# Altium PCB DS_NEW.PcbDoc
Units mm, origin at the board's own origin, x right, y up, seen from the top; angles counter-clockwise.
Board outline 77 x 51 mm, 2 copper layers (Top Layer, Bottom Layer); 60 components, 50 nets, 247 pads, 49 vias.
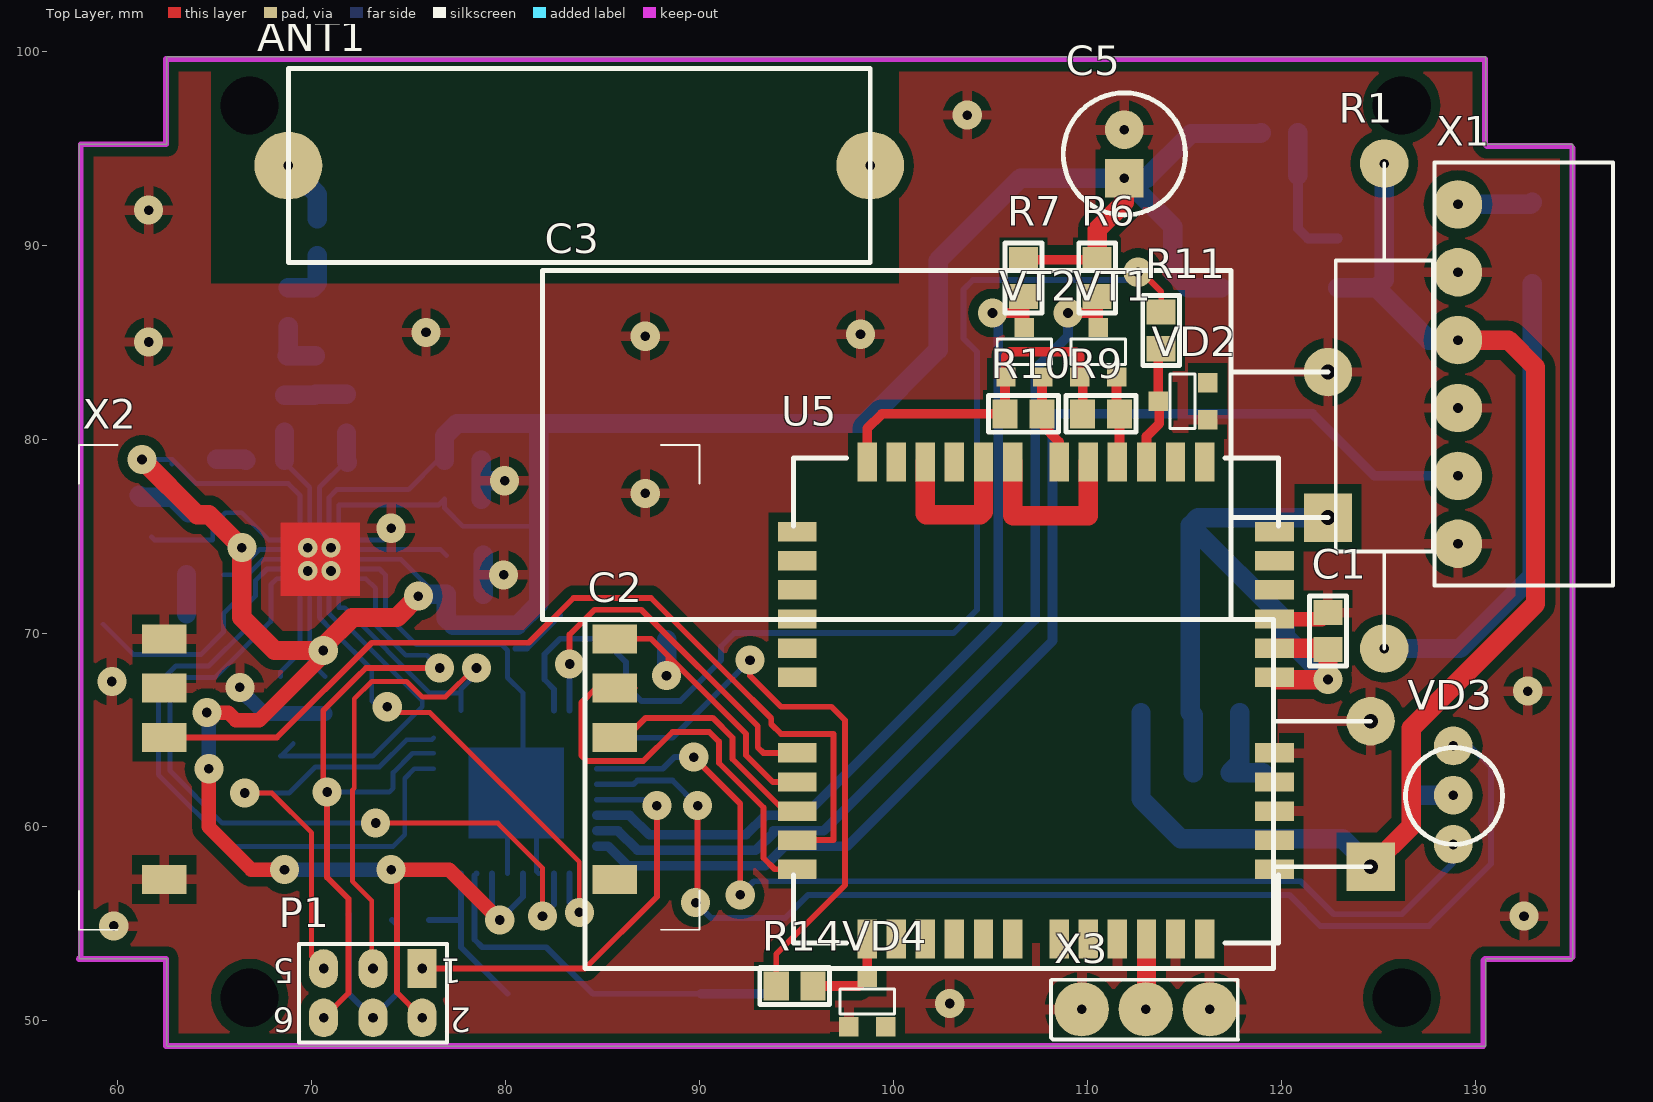
[diagram p0: Top Layer view]
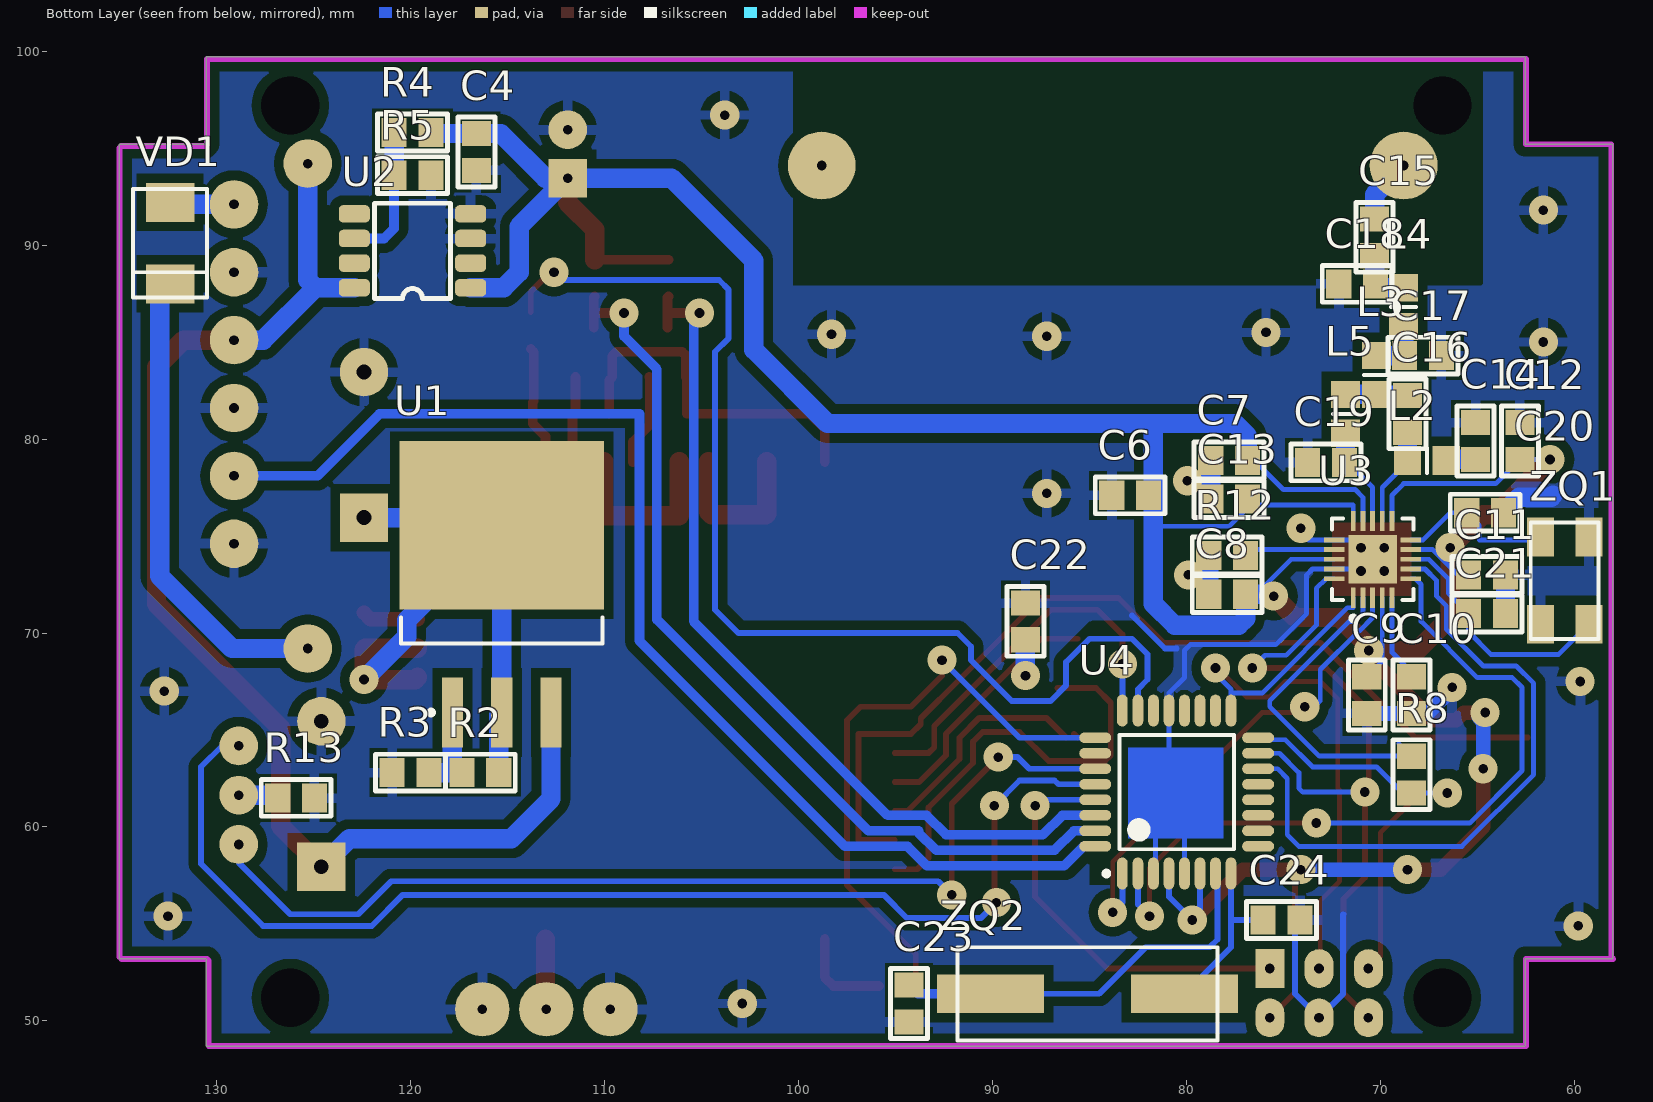
[diagram p1: Bottom Layer view, seen from below]

## Layer stack, top to bottom
Top Layer: signal copper 0.0356
Dielectric: dielectric 0.32, FR-4, Dk 4.8
Bottom Layer: signal copper 0.0356

## Board outline
58.02,53.203 62.52,53.203 62.52,48.703 130.52,48.703 130.52,53.203 135.02,53.203 135.02,95.203 130.52,95.203 130.52,99.703 62.52,99.703 62.52,95.203 58.02,95.203

## Design rules (kind name [scope] priority, off if disabled: settings)
Clearance Clearance_1 [OnLayer(Keepout) And IsTrack] p1: gap=0.05
Clearance "Clearance_ U4_pins" [InComponent('U4') And IsPad] p2: gap=0.25
Clearance "Clearance_GND_VCC +3.3" [InNet('GND') vs InNet('VCC +3.3')] p3 off: gap=0.2
Clearance Clearance_U3_Trace [(IsTrack  And IsNet)  And InRegion(3815,3770 ,4275 ,4280) vs (IsTrack  And IsNet)  And InRegion(3815,3770 ,4275 ,4280)] p4: gap=0.2
Clearance Clearance_QFP_NET [InNet('GND','NetC16_1','NetC19_1','NetC6_2','NetC20_1','NetC21_1','SPI_SS','SPI_SCK','SPI_MOSI','SPI_MISO','NetR12_2','NetC10_2','TR_GDO2','TR_GDO0','NetR8_1','VCC+3.3V')  And InRegion(2560,2673 ,2960 ,3110) vs InNet('GND','NetC16_1','NetC19_1','NetC6_2','NetC20_1','NetC21_1','SPI_SS','SPI_SCK','SPI_MOSI','SPI_MISO','NetR12_2','NetC10_2','TR_GDO2','TR_GDO0','NetR8_1')  And InRegion(2560,2673 ,2960 ,3110)] p5: gap=0.2
Clearance Clearance_QFP_Pins [InComponent('U3') And IsPad] p6: gap=0.2
Clearance Clearance_GND [InPolygon] p7: gap=0.5
Clearance [All] p8: gap=0.3
ComponentClearance ComponentClearance_R1_C10 [InComponent('C10') vs InComponent('R1')] p1 off: gap=0 collisioncheckmode=3 verticalgap=0 showdistances=FALSE
ComponentClearance [All] p2 off: gap=0.3 collisioncheckmode=3 verticalgap=0.3 showdistances=FALSE
HoleSize [All] p1: absolutevalues=TRUE maxlimit=5 minlimit=0.3 maxpercent=80.000 minpercent=20.000
MinimumSolderMaskSliver [All] p1 off: minsoldermaskwidth=0.254
NetAntennae [All] p1 off: netantennaetolerance=50
PlaneConnect [All] p1: planeconnectstyle=Relief reliefexpansion=0.508 reliefentries=4 reliefconductorwidth=0.3 reliefairgap=0.3
PolygonConnect [All] p1: connectstyle=Relief reliefconductorwidth=0.5 reliefentries=4 polygonreliefangle="90 Angle"
RoutingCorners [All] p1: cornerstyle=45-Degree minsetback=2.54 maxsetback=5
RoutingVias [All] p1: holewidth=0.5 width=1.6 viastyle="Through Hole" minholewidth=0.3 minwidth=1 maxholewidth=1 maxwidth=2
ShortCircuit ShortCircuit_ANT1 [InComponent('ANT1')] p1 off: allowed=TRUE
ShortCircuit [All] p2: allowed=FALSE
SilkToSilkClearance [All] p1 off: silktosilkclearance=0.3
SilkscreenOverComponentPads [All] p1 off: minsilkscreentomaskgap=0.254
SolderMaskExpansion [All] p1: expansion=0.102
Width [All] p1: maxlimit=5 minlimit=0.2 preferedwidth=0.3
19 further rules are at their usual default settings.

## Components (designator, comment, footprint, x,y, rotation, side; value= is the part's Value field where it differs from the comment)
ANT1 "SPIRAL_433MHz" ANT_433MHz_SPIRAL 83.8,94.1 r0 top
C1 "KONDENS_SMD" C0805 122.4,70.1 r90 top
C2 "K50-35" CAP_POL_D18-Horizontal 124.6,61.7 r180 top
C3 "K50-35" CAP_POL_D18-Horizontal 122.4,79.7 r180 top
C4 "KONDENS_SMD" C0805 116.6,94.8 r270 bottom
C5 "K50-35" CAP_POL_D6.3 111.9,94.7 r90 top
C6 "KONDENS_SMD" C0805 82.9,77.1 r180 bottom
C7 "KONDENS_SMD" C0805 77.8,78.9 r180 bottom
C8 "KONDENS_SMD" C0805 77.9,72 r180 bottom
C9 "KONDENS_SMD" C0805 70.7,66.8 r90 bottom
C10 "KONDENS_SMD" C0805 68.4,66.8 r90 bottom
C11 "KONDENS_SMD" C0805 64.5,73 r0 bottom
C12 "KONDENS_SMD" C0805 62.8,79.9 r270 bottom
C13 "KONDENS_SMD" C0805 77.8,76.9 r180 bottom
C14 "KONDENS_SMD" C0805 65.1,79.9 r90 bottom
C15 "KONDENS_SMD" C0805 70.3,90.4 r270 bottom
C16 "KONDENS_SMD" C0805 68.6,81.3 r90 bottom
C17 "KONDENS_SMD" C0805 67.8,84.3 r180 bottom
C18 "KONDENS_SMD" C0805 71.2,88 r0 bottom
C19 "KONDENS_SMD" C0805 72.8,78.8 r0 bottom
C20 "KONDENS_SMD" C0805 64.6,76.2 r180 bottom
C21 "KONDENS_SMD" C0805 64.5,71 r180 bottom
C22 "KONDENS_SMD" C0805 88.3,70.6 r270 bottom
C23 "KONDENS_SMD" C0805 94.3,50.9 r270 bottom
C24 "KONDENS_SMD" C0805 75.1,55.2 r180 bottom
L2 "SMD_0805" 6-0805_M 67.6,78.9 r180 bottom
L3 "SMD_0805" 6-0805_M 70.2,83.3 r90 bottom
L4 "SMD_0805" 6-0805_M 68.8,86.8 r90 bottom
L5 "SMD_0805" 6-0805_M 71.8,81.3 r90 bottom
P1 "Header 3X2" HDR2X3 75.7,52.7 r180 top
R1 "KNP-200" "Resistor KNP-200" 125.3,69.2 r90 top
R2 "RES" C0805 116.4,62.8 r180 bottom
R3 "RES" C0805 120,62.8 r180 bottom
R4 "RES" C0805 119.9,95.8 r180 bottom
R5 "RES" C0805 119.9,93.6 r0 bottom
R6 "RES" C0805 110.5,88.3 r90 top
R7 "RES" C0805 106.7,88.3 r90 top
R8 "RES" C0805 68.4,62.7 r270 bottom
R9 "RES" C0805 110.7,81.3 r180 top
R10 "RES" C0805 106.7,81.3 r180 top
R11 "RES" C0805 113.8,85.6 r90 top
R12 "RES" C0805 77.9,74 r180 bottom
R13 "RES" C0805 125.9,61.5 r0 bottom
R14 "RES" C0805 94.9,51.8 r180 top
U1 "LM1086CS-ADJ" TS3B_M 115.3,72 r90 bottom
U2 "LP2951" SOIC-8 116.9,87.8 r0 bottom
U3 "CC1101" VQFN20 70.4,73.8 r90 bottom
U4 "ATmega8A-AU" 32A_N 80.5,61.8 r90 bottom
U5 "WISMO 228" WISMO 95,75.2 r0 top
VD1 "10BQ100" SMB 132.4,90.1 r90 bottom
VD2 "BZX84C2V7" SOT23 116.2,81 r90 top
VD3 "LIGHTDIODE2" LIGHTDIODE2 128.9,61.6 r270 top
VD4 "BZX84C2V7" SOT23 97.7,49.7 r0 top
VT1 "BSS138-SOT23" SOT23 109.6,83.2 r0 top
VT2 "BSS138-SOT23" SOT23 105.8,83.2 r0 top
X1 "15EDGRC-3.5-06P" 15EDGRC-3.5-06P 129.1,92.1 r270 top locked
X2 "MOLEX91228-0001" MOLEX91228-0001 86,69.7 r180 top
X3 "ANT-Healder" ANT-Healder 113,50.6 r180 top
ZQ1 "SMD0603" Quartz_SMD0603 60.5,72.7 r90 bottom
ZQ2 "HC-49SMD" HC-49SMD 85.1,51.4 r180 bottom

## Footprints (in the part's own frame and the unit in brackets; to place one, negate y for a bottom-side part, rotate by r counter-clockwise, add the part's x,y. Pads: shape width x height; smd on the part's side, far side on the other; paste and mask are expansions set on the pad)
6-0805_M [mm] "Chip Resistor, Body 2.0x1.2mm, IPC Low Density"
  rect 1.4x1.5 smd: 1(-1,0) 2(1,0)
  silkscreen extent 0,-0.65 0,0.65, body extent -1.07,-0.7 1.07,0.7, height 0.7
15EDGRC-3.5-06P [mm]
  round 2.5 hole 0.5: 1(0,0) 2(3.5,0) 3(7,0) 4(10.5,0) 5(14,0) 6(17.5,0)
  silkscreen extent -2.15,-1.2 19.65,8, body extent -2.1,-1.2 19.6,8, height 7
32A_N [mm] "Thin QFP, 32-Leads, Body 7x7mm, Pitch 0.8mm, IPC Medium Density"
  oval 1.65x0.55 smd: 1(-4.2,2.8) 2(-4.2,2) 3(-4.2,1.2) 4(-4.2,0.4) 5(-4.2,-0.4) 6(-4.2,-1.2) 7(-4.2,-2) 8(-4.2,-2.8) 17(4.2,-2.8) 18(4.2,-2) 19(4.2,-1.2) 20(4.2,-0.4) 21(4.2,0.4) 22(4.2,1.2) 23(4.2,2) 24(4.2,2.8)
  oval 0.55x1.65 smd: 9(-2.8,-4.2) 10(-2,-4.2) 11(-1.2,-4.2) 12(-0.4,-4.2) 13(0.4,-4.2) 14(1.2,-4.2) 15(2,-4.2) 16(2.8,-4.2) 25(2.8,4.2) 26(2,4.2) 27(1.2,4.2) 28(0.4,4.2) 29(-0.4,4.2) 30(-1.2,4.2) 31(-2,4.2) 32(-2.8,4.2)
  silkscreen extent -4.32,-2.95 2.95,3.75, body extent -3.5,-3.5 3.5,3.5, height 1.2
ANT-Healder [mm]
  round 2.8 hole 0.5: 1(0,0) 2(-3.3,0) 3(3.3,0)
  silkscreen extent -4.78,-1.53 4.87,1.55
ANT_433MHz_SPIRAL [mm]
  round 3.5 hole 0.5: 1(-15,0) 2(15,0)
  silkscreen extent -15,-5 15,5
C0805 [mm]
  rect 1.3x1.5 smd: 1(-0.95,0) 2(0.95,0)
  silkscreen extent -1.8,-0.95 1.8,0.95
CAP_POL_D6.3 [mm]
  rect 2x2 hole 0.5: 1(-1.25,0)
  round 2 hole 0.5: 2(1.25,0)
  silkscreen extent -3.15,-3.15 3.15,3.15, body extent -3.13,-3.14 3.15,3.14, height 11
CAP_POL_D18-Horizontal [mm]
  rect 2.5x2.5 hole 0.762: 1(0,3.75)
  round 2.5 hole 0.762: 2(0,-3.75)
  silkscreen extent 0,-9 40.5,9
HC-49SMD [mm]
  rect 5.5x2 smd: 1(-5,0) 2(5,0)
  silkscreen extent -6.7,-2.4 6.7,2.4, body extent -6.7,-2.4 6.7,2.4, height 4
HDR2X3 [mm] "Connector; Header; 3x2 Position"
  rect 1.5x2 hole 0.5: 1(0,0)
  oval 1.5x2 hole 0.5: 2(0,2.54) 3(2.54,0) 4(2.54,2.54) 5(5.08,0) 6(5.08,2.54)
  silkscreen extent -1.27,-1.27 6.35,3.81
LIGHTDIODE2 [mm]
  round 2 hole 0.5: 1(-0.04,-0.04) 2(-2.58,-0.04) 3(2.5,-0.04)
  silkscreen extent -2.5,-2.5 2.5,2.5
MOLEX91228-0001 [mm]
  rect 2.3x1.5 smd: 1(0.38,0) 2(0.38,2.54) 3(0.38,5.08) 4(23.6,0) 5(23.6,2.54) 6(23.6,5.08) 7(23.6,12.4) 8(0.38,12.4)
  silkscreen extent -4,-10 28,15
Quartz_SMD0603 [mm]
  rect 2x1.4 smd: 1(-2.25,-1.25) 2(2.25,-1.25) 3(2.25,1.25) 4(-2.25,1.25)
  silkscreen extent -3,-1.75 3,1.75
"Resistor KNP-200" [mm]
  round 2.5 hole 0.5: 1(0,0) 2(25,0)
  silkscreen extent 0,-2.5 25,2.5
SMB [mm]
  rect 2x2.5 smd: 1(-2.1,0) 2(2.1,0)
  silkscreen extent -2.8,-1.9 2.8,1.9
SOIC-8 [mm]
  rrect50% 1.6x0.9 smd: 1(0,0) 2(0,-1.27) 3(0,-2.54) 4(0,-3.81) 5(6,-3.81) 6(6,-2.54) 7(6,-1.27) 8(6,0)
  silkscreen extent 1.05,-4.36 4.95,0.55
SOT23 [mm]
  rect 1x1 smd: 1(0,0) 2(1.9,0) 3(0.95,2.55)
  silkscreen extent -0.45,0.65 2.35,1.95
TS3B_M [mm] "D2-PAK, 4-Leads, Body 8.6x10.2mm, Pitch 2.54mm, Lead Span 14.2mm, IPC Low Density"
  rect 3.6x1.1 smd: 1(-6.1,2.54) 2(-6.1,0) 3(-6.1,-2.54)
  rect 8.7x10.55 smd: 4(3.55,0)
  silkscreen extent -6.22,-5.2 -1.2,5.2, body extent -2.55,-5.2 6.34,5.2, height 4.64
VQFN20 [mm] "QFN, 20-Leads, Body 4,2x4,2mm (max), Pitch 0,50mm, IPC Low Density"
  rect 1.05x0.25 smd: 1(-1.975,1) 2(-1.975,0.5) 3(-1.975,0) 4(-1.975,-0.5) 5(-1.975,-1) 11(1.975,-1) 12(1.975,-0.5) 13(1.975,0) 14(1.975,0.5) 15(1.975,1)
  rect 0.25x1.05 smd: 6(-1,-1.975) 7(-0.5,-1.975) 8(0,-1.975) 9(0.5,-1.975) 10(1,-1.975) 16(1,1.975) 17(0.5,1.975) 18(0,1.975) 19(-0.5,1.975) 20(-1,1.975)
  rect 2.5x2.5 smd: 21(0,0)
  silkscreen extent -3.17,-2.1 2.1,2.1, body extent -2.07,-2.07 2.07,2.07, height 0.8
WISMO [mm]
  rect 2x1 smd: 1(0.04,0.02) 2(0.04,-1.48) 3(0.04,-2.98) 4(0.04,-4.48) 5(0.04,-5.98) 6(0.04,-7.48) 7(0.04,-11.38) 8(0.04,-12.88) 9(0.04,-14.38) 10(0.04,-15.88) 11(0.04,-17.38) 24(24.64,-17.38) 25(24.64,-15.88) 26(24.64,-14.38) 27(24.64,-12.88) 28(24.64,-11.38) 29(24.64,-7.48) 30(24.64,-5.98) 31(24.64,-4.48) 32(24.64,-2.98) 33(24.64,-1.48) 34(24.64,0.02)
  rect 1x2 smd: 12(3.64,-20.98) 13(5.14,-20.98) 14(6.64,-20.98) 15(8.14,-20.98) 16(9.64,-20.98) 17(11.14,-20.98) 18(13.54,-20.98) 19(15.04,-20.98) 20(16.54,-20.98) 21(18.04,-20.98) 22(19.54,-20.98) 23(21.04,-20.98) 35(21.04,3.62) 36(19.54,3.62) 37(18.04,3.62) 38(16.54,3.62) 39(15.04,3.62) 40(13.54,3.62) 41(11.14,3.62) 42(9.64,3.62) 43(8.14,3.62) 44(6.64,3.62) 45(5.14,3.62) 46(3.64,3.62)
  silkscreen extent -0.16,-21.18 24.84,3.82, body extent -0.1,-21.2 24.8,3.8, height 2.8

## Part data
ANT1: library part ANT_433MHz_SPIRAL
C2 C3: library part "Capasitor _pol D18"
C5: library part "Capasitor_pol D6.3"
L2 L3 L4 L5: library part Induktor_0805
P1: "Header, 3-Pin, Dual row"
R1: library part "Resistor 2W"
R2 R3 R4 R5 R6 R7 R8 R9 R10 R11 R12 R13 R14: "Resistor"
U1: "1.5A Low Dropout Positive Regulators, 3-pin TO-263"
U4: "8-bit AVR Microcontroller, 8KB Flash, 512 Bytes EEPROM, 1KB SRAM, 32-pin TQFP, Industrial Grade (-40°C to 85°C)"
X3: library part ANT_HELDER
ZQ1: library part Quartz_SMD0603

## Free pads (board coordinates)
  round 0 hole 3 unplated: 0(66.8,97.2) 1(126.2,97.2) 2(126.2,51.2) 3(66.8,51.2)

## Via types
v1: diameter 1.5, hole 0.5, Top Layer to Bottom Layer, 45 vias
v2: diameter 1, hole 0.5, Top Layer to Bottom Layer, tented top, 4 vias

## Nets (pads, with @x,y where several pads share a name; then routed paths per layer and width w, separated by ;. In a path a pad name is that pad's centre, name@x,y a point inside that pad or via, vN(x,y) a via of type N, cw(c..) or ccw(c..) an arc to the next point about the centre after c; other vN are vias at no path point)
GND: C1.2 C2.2 C3.2 C4.2 C5.2 C6.1 C7.1 C8.1 C9.1 C10.1 C11.1 C12.1 C13.1 C14.2 C17.2 C18.2 C19.2 C20.2 C21.2 C22.1 C23.2 C24.2 P1.4 R3.1 R5.1 R12.1 R13.1 U2.3 U2.4 U3.16 U3.19 U3.21 U4.3 U4.5 U4.21 U5.20 U5.22 U5.26 U5.28 U5.31 VD2.1 VD4.1 X1.2 X1.4 X1.6 X2.4 X2.5 X2.7 X3.2 X3.3 ZQ1.2 ZQ1.4 | length 66.5
  Top Layer w0.25: v1(74.1,75.4) v1@74.2,75.5
  Top Layer w0.75: U5.31 122.07,70.72 C1.2
  Bottom Layer w0.25: v2(71,73.2) 71.1,73.3 U3.19 73.5,73.3 73.8,73 73.8,71 75.4,69.4 79.8,69.4 80.1,69.1 80.1,67.7 80.9,66.9 U4.21 80.9,61.2 80.8,61.1 ; v2(71,74.4) 71.4,74.8 U3.16 73.7,74.8 74,75.1 74,75.3 v1(74.1,75.4) ; U4.5 80.1,61.1 80.8,61.1 ; U4.3 81.6,57.7 81.6,61.1 80.8,61.1
  Bottom Layer w0.3: 71.9,55.5 71.92,55.48 71.92,51.4 P1.4 74.4,51.4 74.4,54.95 C24.2 ; 80.5,69.2 81.1,69.2 82.8,70.9
  Bottom Layer w0.75: v1(66.3,67.2) 66.2,67.2 67.55,65.85 C10.1 C9.1
  Bottom Layer w1: 61.1,77.1 61.2,77 62.85,77 C20.2 ; C21.2 C11.1 ; C13.1 78.75,77.85 ; C7.1 78.75,77.85 ; C8.1 78.85,73 ; R12.1 78.85,73 ; v1(79.9,73) 78.85,73 ; v1(79.95,77.85) 78.75,77.85
  other v1: 102.9,50.9 59.8,54.9 132.5,55.4 132.7,67 59.7,67.5 87.2,77.2 61.6,85 87.2,85.3 98.3,85.4 75.9,85.5 61.6,91.8 103.8,96.7
  other v2: 69.8,73.2 69.8,74.4
NetANT1_1: ANT1.1 C15.1 | length 3.4
  Bottom Layer w1: ANT1.1 70.3,92.6 C15.1
NetC2_1: C2.1 R1.2 U1.3 U2.8 X1.3 | length 65.5
  Top Layer w1: C2.1 126.7,60.05 126.7,65.1 133.1,71.5 133.1,83.7 131.7,85.1 X1.3
  Bottom Layer w1: U1.3 112.76,61.44 114.8,59.4 123.15,59.4 C2.1 ; U2.8 124.9,87.8 ; R1.2 125.3,88.2 124.9,87.8 ; X1.3 127.6,85.1 124.9,87.8
NetC10_2: C10.2 U3.5 | length 4.5
  Bottom Layer w0.25: C10.2 68.4,68 69.4,69 U3.5
NetC14_1: C14.1 L2.2 | length 1.5
  Bottom Layer w1: C14.1 66.55,78.95 L2.2
NetC15_2: C15.2 C18.1 L4.2 | length 3
  Bottom Layer w1: L4.2 70.05,87.8 C18.1 70.3,88.05 C15.2
NetC16_1: C16.1 L2.1 U3.12 | length 5.1
  Bottom Layer w0.25: L2.1 68.6,78.8 69.9,77.5 U3.12
  Bottom Layer w1: L2.1 C16.1
NetC16_2: C16.2 L3.1 L5.2 | length 3.2
  Bottom Layer w1: C16.2 70.15,82.25 L3.1 L5.2
NetC17_1: C17.1 L3.2 L4.1 | length 3
  Bottom Layer w1: L4.1 68.8,84.35 C17.1 L3.2
NetC19_1: C19.1 L5.1 U3.13 | length 5.2
  Bottom Layer w0.25: U3.13 70.4,77.5 71.75,78.85 C19.1@71.8,78.85
  Bottom Layer w1: L5.1 71.8,78.85 C19.1
NetC20_1: C20.1 U3.10 ZQ1.3 | length 8.3
  Bottom Layer w0.25: ZQ1.3 61.9,74.8 64.9,74.8 64.9,75.55 C20.1 66.4,76.2 67.8,74.8 U3.10
NetC21_1: C21.1 U3.8 ZQ1.1 | length 12.8
  Bottom Layer w0.25: ZQ1.1 60.8,68.9 64.3,68.9 65.45,70.05 C21.1 66.5,72.05 66.5,72.8 67.5,73.8 U3.8
NetC22_2: C22.2 U5.8 X2.1 | length 16
  Top Layer w0.3: X2.1 87.5,69.7 88.4,68.8 ; v1(88.3,67.8) 88.4,67.9 88.4,68.8 ; U5.8 93.78,62.32 92.4,63.7 92.4,64.8 88.4,68.8
  Bottom Layer w1: v1(88.3,67.8) C22.2
NetC23_1: C23.1 U4.7 ZQ2.1 | length 20.7
  Bottom Layer w0.3: U4.7 78.4,57.5 78.4,54.2 78.8,53.8 82.1,53.8 84.5,51.4 ZQ2.1
  Bottom Layer w0.5: ZQ2.1 93.85,51.4 C23.1
NetC24_1: C24.1 U4.8 ZQ2.2 | length 8.8
  Bottom Layer w0.3: C24.1 77.7,55.2 ; U4.8 77.7,55.2 ; ZQ2.2 77.7,53.8 77.7,55.2
NetR1_1: R1.1 VD1.1 | length 24.2
  Bottom Layer w1: R1.1 129.2,69.2 132.938,72.938 VD1.1@132.938,88
NetR3_2: R2.1 R3.2 U1.1 | length 5
  Bottom Layer w1: U1.1 117.84,63.29 R2.1 R3.2
NetR4_1: R4.1 R5.2 U2.6 | length 7.2
  Bottom Layer w0.5: R5.2 120.85,90.85 121.36,90.34 U2.6
  Bottom Layer w1: R5.2 R4.1
NetR8_1: R8.1 U3.2 | length 17.1
  Bottom Layer w0.25: 69.05,64.3 R8.1 73.15,63.65 75.7,66.2 75.7,66.5 71.6,70.6 71.3,70.6 70.9,71 U3.2
NetR9_1: R9.1 U5.38 VT1.2 | length 4.5
  Top Layer w0.5: VT1.2 111.5,81.45 R9.1 111.65,78.93 U5.38
NetR9_2: R9.2 R10.2 U5.46 VT1.1 VT2.1 | length 19.2
  Top Layer w0.5: U5.46 98.64,80.54 99.4,81.3 R10.2 105.75,83.15 VT2.1 105.8,84.3 106,84.5 109.4,84.5 109.6,84.3 VT1.1 109.75,83.05 R9.2
NetR10_1: R10.1 U5.40 VT2.2 | length 4.8
  Top Layer w0.5: VT2.2 107.65,83.15 R10.1 107.65,80.75 108.54,79.86 U5.40
NetR11_1: R11.1 U5.37 VD2.3 | length 6.2
  Top Layer w0.5: U5.37 113.04,80.14 113.7,80.8 113.7,81.9 VD2.3 113.65,84.5 R11.1
NetR12_2: R12.2 U3.17 | length 4.7
  Bottom Layer w0.25: U3.17 76.65,74.3 R12.2
NetR13_2: R13.2 VD3.1 | length 2.1
  Bottom Layer w1: R13.2 126.99,61.64 VD3.1
NetR14_1: R14.1 U5.12 VD4.3 | length 5
  Top Layer w0.5: R14.1 98.2,51.8 VD4.3 98.64,52.26 U5.12
NetU4_27: U4.27 VD3.3 | length 53.6
  Top Layer w0.3: v1(89.7,63.6) 92.1,61.2 v1(92.1,56.5)
  Bottom Layer w0.3: U4.27 88.1,63 88.7,63.6 v1(89.7,63.6) v1@90.2,63.6 ; v1(92.1,56.5) 92.8,57.2 121,57.2 122.7,55.5 126.2,55.5 128.86,58.16 VD3.3
NetU4_28: U4.28 VD3.2 | length 62.1
  Top Layer w0.3: v1(89.8,56.1) 89.9,56.1 v1(89.9,61.1)
  Bottom Layer w0.3: U4.28 86.6,62.2 86.8,62.4 88.6,62.4 v1(89.9,61.1) ; v1(89.8,56.1) 90.6,55.3 94.4,55.3 95.6,56.5 120.4,56.5 122,54.9 127.6,54.9 130.8,58.1 130.8,63.1 129.72,64.18 VD3.2
NetU4_32: U4.32 X1.5 | length 62.6
  Bottom Layer w0.5: U4.32 85.3,59 86.3,58 93.375,58 94.375,59 97.6,59 108.2,69.6 108.2,81.3 121.6,81.3 124.8,78.1 X1.5
NetU5_9: U5.9 X2.3 | length 12.1
  Top Layer w0.3: X2.3 X2.3@85.8,64.8 ; X2.3@86.22,64.62 87.225,65.625 90.675,65.625 91.7,64.6 91.7,63.5 94.38,60.82 U5.9
NetU5_10: U5.10 X2.6 | length 47.9
  Top Layer w0.3: X2.6 68.22,64.62 73.1,69.5 81.2,69.5 83.5,71.8 87.5,71.8 91.7,67.6 93.7,65.6 93.7,65.3 94.2,64.8 96.9,64.8 96.9,59.32 U5.10
NetU5_11: U5.11 X2.2 | length 22.7
  Top Layer w0.3: X2.2@86.64,67.16 X2.2 84.66,67.16 83.9,66.4 83.9,63.7 84.2,63.4 87.1,63.4 88.6,64.9 90.5,64.9 91,64.4 91,63.3 93.3,61 93.3,58.4 93.88,57.82 U5.11
NetU5_21: U5.21 X3.1 | length 3.6
  Top Layer w1: X3.1 113.04,50.64 U5.21
NetU5_39: U5.39 U5.41 | length 9.4
  Top Layer w1: U5.41 106.14,76.06 106.16,76.04 110.04,76.04 U5.39
NetU5_42: U5.42 U5.44 | length 8.3
  Top Layer w1: U5.44 101.64,76.14 101.68,76.1 104.48,76.1 104.64,76.26 U5.42
NetVD1_2: VD1.2 X1.1 | length 3.9
  Bottom Layer w1: X1.1 132.838,92.1 VD1.2@132.938,92.2
ON/OFF: R11.2 U4.23 | length 59
  Top Layer w0.3: v1(112.6,88.6) 112.8,88.6 113.8,87.6 R11.2
  Bottom Layer w0.3: U4.23 82.5,67.1 82,67.6 82,68.9 82.8,69.7 85,69.7 86.2,68.5 86.2,67.3 87,66.5 89,66.5 91.1,68.6 91.1,69.3 91.8,70 103.1,70 104.3,71.2 104.3,84.5 103.6,85.2 103.6,87.7 104.1,88.2 112.2,88.2 v1(112.6,88.6)
READY: U4.24 U5.7 | length 19.9
  Top Layer w0.3: v1(83.3,68.4) 83.3,69.916 84.584,71.2 87,71.2 93,65.2 93,64.1 93.28,63.82 U5.7
  Bottom Layer w0.3: U4.24 v1(83.3,68.4)
RESET: R14.2 U4.25 | length 31.4
  Top Layer w0.3: v1(92.6,68.6) 92.6,67.8 94.2,66.2 96.8,66.2 97.5,65.5 97.5,57 93.95,53.45 R14.2
  Bottom Layer w0.3: U4.25 88.6,64.6 v1(92.6,68.6)
RESET_MCU: P1.1 U4.29 | length 21.6
  Top Layer w0.3: P1.1 84.1,52.7 87.8,56.4 v1(87.8,61.1)
  Bottom Layer w0.3: U4.29 87.5,61.4 v1(87.8,61.1)
RXD: R7.1 U4.30 VT2.3 | length 45.2
  Top Layer w0.5: v1(105.1,86.5) 106.75,86.5 ; R7.1 106.75,87.3 106.75,86.5 ; VT2.3 106.75,86.5
  Bottom Layer w0.5: U4.30 86.4,60.6 87.4,59.6 92.4,59.6 93.4,60.6 95.4,60.6 105.4,70.6 105.4,86.2 v1(105.1,86.5) v1@104.9,86.7
SPI_MISO: P1.5 R8.2 U4.16 | length 22.5
  Top Layer w0.25: v1(66.55,61.75) 67.95,61.75 70,59.7 70,53.32 P1.5
  Bottom Layer w0.25: v1(66.55,61.75) R8.2 68.85,61.75 70.2,63.1 73.5,63.1 74.9,64.5 76.2,64.5 U4.16
SPI_MOSI: P1.6 U3.20 U4.15 | length 38.5
  Top Layer w0.3: P1.6 71.9,51.44 71.9,56.3 70.8,57.4 v1(70.8,61.8) 70.6,62 70.6,66 72.3,67.7 72.8,68.2 v1(76.6,68.2)
  Bottom Layer w0.25: v1@70.8,62.4 v1(70.8,61.8) 74,61.8 74.2,62 74.2,62.8 75.2,63.8 U4.15 ; U3.20 72.8,72.8 73.3,72.3 73.3,70.4 74.85,68.85 75.95,68.85 v1(76.6,68.2)
SPI_SCK: P1.3 U3.1 U4.17 | length 33.2
  Top Layer w0.25: P1.3 73.1,52.76 73.1,56.2 72.1,57.2 72.1,61.9 72.2,62 72.2,66.6 73.1,67.5 74.9,67.5 75.7,66.7 76.9,66.7 78.4,68.2 v1(78.5,68.2)
  Bottom Layer w0.25: U3.1 71.4,71.3 71.7,71.3 76.1,66.9 77.7,66.9 ; U4.17 77.7,66.9 ; v1(78.5,68.2) 78.5,67.9 77.7,67.1 77.7,66.9
SPI_SS: U3.7 U4.14 | length 33.7
  Bottom Layer w0.25: U3.7 67.7,73.3 67.1,72.7 67.1,71.9 66.6,71.4 66.6,70.2 64.7,68.3 63,68.3 62.1,67.4 62.1,62.7 65.8,59 74.2,59 74.8,59.6 74.8,62.5 75.3,63 U4.14
TR_GDO0: U3.6 U4.2 | length 39.7
  Top Layer w0.25: v1(73.3,60.2) 79.6,60.2 81.9,57.9 v1(81.9,55.4)
  Bottom Layer w0.25: U3.6 68.2,72.8 67.9,72.5 67.9,70.6 65,67.7 63.2,67.7 62.7,67.2 62.7,62.9 65.4,60.2 v1(73.3,60.2)
  Bottom Layer w0.3: v1(81.9,55.4) 82.5,56 U4.2
TR_GDO2: U3.3 U4.1 | length 25.5
  Top Layer w0.25: v1@73.7,65.9 76.1,65.9 83.8,58.2 v1(83.8,55.6)
  Top Layer w0.3: v1@83.8,55.5 v1(83.8,55.6)
  Bottom Layer w0.25: U3.3 70.4,70.8 71.1,70.1 71.12,70.1 73.1,68.12 73.1,66.5 v1@73.7,65.9
  Bottom Layer w0.3: U4.1 83.3,56.1 v1(83.8,55.6)
  other v1: 73.9,66.2
TXD: R6.1 U4.31 VT1.3 | length 47.8
  Top Layer w0.5: v1(109,86.5) 110.55,86.5 ; R6.1 110.55,87.3 110.55,86.5 ; VT1.3 110.55,86.5
  Bottom Layer w0.5: U4.31 85.8,59.8 86.8,58.8 92.9,58.8 93.8,59.7 93.8,59.8 96.4,59.8 107.3,70.7 107.3,83.6 109,85.3 v1(109,86.5) v1@108.9,86.6
VCC+3.3V: C4.1 C5.1 C6.2 C7.2 C8.2 C9.2 C11.2 C12.2 C13.2 P1.2 R4.2 R6.2 R7.2 U2.1 U3.4 U3.9 U3.11 U3.14 U3.15 U3.18 U4.4 U4.6 | length 198.9
  Top Layer w0.3: v1(74.1,57.8) 74.4,57.5 74.4,51.46 P1.2
  Top Layer w0.5: R7.2 R6.2
  Top Layer w0.75: v1(64.6,65.9) 65.7,65.9 66.1,65.5 67.3,65.5 70.6,68.8 v1(70.6,69.1) ; v1(64.7,63) 64.7,60 66.9,57.8 v1(68.6,57.8) ; v1(74.1,57.8) 77.1,57.8 v1(79.7,55.2)
  Top Layer w1: v1(61.25,78.95) 64.1,76.1 64.7,76.1 v1(66.4,74.4) 66.4,70.8 68.1,69.1 v1(70.6,69.1) 70.6,69.3 72.1,70.8 74.4,70.8 v1(75.5,71.9) ; R6.2 110.5,90.8 111.9,92.2 C5.1
  Bottom Layer w0.25: v1(61.25,78.95) C12.2 ; C12.2@62.8,78.7 C12.2 ; C11.2 66,73 66.65,73.65 ; v1(66.4,74.4) 66.65,74.65 66.65,73.65 ; U3.9 67.3,74.3 66.65,73.65 ; U3.11 69.4,77.1 68.8,77.7 64.05,77.7 C12.2 ; U3.4 v1@69.9,69 ; v1(70.6,69.1) 70.5,69.1 70.6,69 v1@69.9,69 ; C9.2 69.9,68.55 v1@69.9,69 ; U3.14 70.9,77 71.3,77.4 75,77.4 76.5,78.9 C7.2 ; U3.15 71.4,76.6 76.55,76.6 C13.2 76.85,76.45 77.8,75.5 81.7,75.5 ; U3.18 74.6,73.8 C8.2@76.4,72
  Bottom Layer w0.3: U4.6 79.3,55.6 v1(79.7,55.2) 80.9,56.4 U4.4
  Bottom Layer w0.75: v1(64.7,63) v1@64.7,65.6 ; v1(68.6,57.8) v1(74.1,57.8)
  Bottom Layer w1: v1@64.7,65.6 v1@64.8,65.7 ; v1(75.5,71.9) 75.6,72 76.4,72 C8.2 76.95,70.75 77.3,70.4 80.6,70.4 81.7,71.5 81.7,75.5 81.7,80.6 81.5,80.8 ; C7.2 76.85,80.15 77.5,80.8 81.5,80.8 ; U2.1 115.2,87.8 114.4,88.6 114.4,90.95 C5.1 ; R4.2 118.9,95.75 C4.1 115.35,95.75 113.05,93.45 C5.1 ; 81.5,80.8 98.5,80.8 102.3,84.6 102.3,89.2 106.55,93.45 C5.1
VCC+4.2V: C1.1 C3.1 R2.2 U1.2 U1.4 U5.29 U5.30 | length 38.1
  Top Layer w1: U5.29 119.76,67.6 v1(122.4,67.6) C1.1 122.33,69.22 U5.30
  Bottom Layer w1: R2.2 115.45,65.75 U1.2 U1.4 ; v1(122.4,67.6) 120.2,69.8 120.2,70.65 U1.4 ; C3.1 115.7,75.95 U1.4
pads on no net: ANT1.2 U2.2 U2.5 U2.7 U4.9 U4.10 U4.11 U4.12 U4.13 U4.18 U4.19 U4.20 U4.22 U4.26 U5.1 U5.2 U5.3 U5.4 U5.5 U5.6 U5.13 U5.14 U5.15 U5.16 U5.17 U5.18 U5.19 U5.23 U5.24 U5.25 U5.27 U5.32 U5.33 U5.34 U5.35 U5.36 U5.43 U5.45 VD2.2 VD4.2 X2.8

## Polygon pours and split planes (outlines as drawn)
GND on Bottom Layer "BOT" (solid, remove dead copper, pour order 2): 62.5,99.6 62.5,95.2 58.1,95.2 58.1,53.3 62.4,53.3 62.5,53.2 62.5,48.7 130.4,48.7 130.4,53.1 134.8,53.1 134.9,53.2 134.9,95.1 130.6,95.1 130.5,95.2 130.5,99.6 100.6,99.6 100.3,99.3 100.3,87.9 64.8,87.9 64.7,88 64.7,99.6
GND on Top Layer "TOP" (solid, remove dead copper, pour order 4): 62.5,99.6 62.5,95.2 58.1,95.2 58.1,53.3 58,53.2 62.5,53.2 62.5,48.7 130.4,48.7 130.4,53.1 130.5,53.2 134.9,53.2 134.9,95 134.95,95.05 134.8,95.2 130.5,95.2 130.5,99.6 100.3,99.6 100.3,88 64.8,88 64.8,99.6

## Keep-outs
Keep-Out Layer:
  lines w0.3: 58,53.2 62.5,53.2 62.5,48.7 130.4,48.7 130.4,53.1 130.5,53.2 134.9,53.2 135,53.3 135,95 134.9,95.1 130.6,95.1 130.5,95.2 130.5,99.6 62.5,99.6 62.5,95.2 60.5,95.2 59.95,95.2 58.85,95.2 58.3,95.2 58.1,95.2 58.1,53.3 58,53.2

## Other copper
Top Layer:
  rectangle net GND: 68.4,71.9 72.5,75.7
  pour cut-out: 94.9,79 95,78.9 119.8,78.9 119.8,54.1 119.7,54 94.9,54
Bottom Layer:
  rectangle net GND: 78.1,59.4 83,64.1
  pour cut-out: 76.337,66.263 84.737,66.263 85,66 85,57 76.3,57 76.2,57.1

## Silkscreen, mask and mechanical layers (free items; w line width, h text height)
Mechanical 1:
  the board outline again, w0.05

## Text inside footprints (layer, text, board x,y; h text height)
P1: Top Overlay "1" at 77.732,53.208 h1.27 r180; Top Overlay "2" at 78.24,50.668 h1.27 r180; Top Overlay "5" at 69.096,53.208 h1.27 r180; Top Overlay "6" at 69.096,50.668 h1.27 r180